# EAGLE board brandon_moded_satshakitpcb (EAGLE 6.5.0)
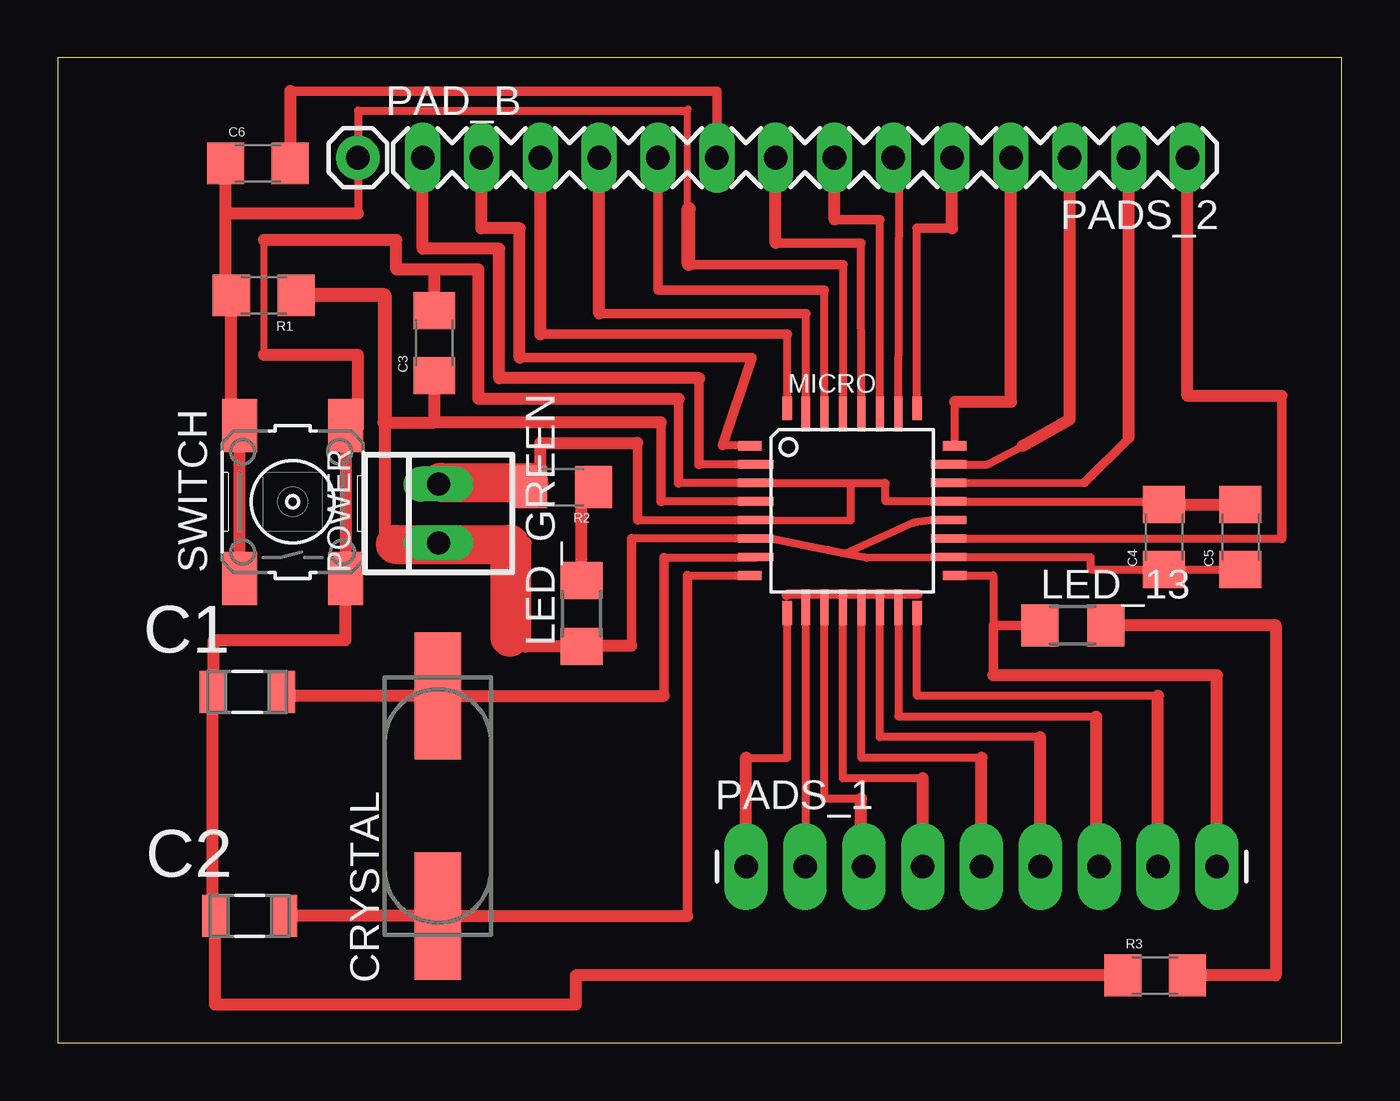
[diagram p0: board, top side]

Size 55.42 x 42.54 mm. Coordinates in mm from the lower left corner, seen from the top.
Outline: 0,0 55.42,0 55.42,42.54 0,42.54 0,0
Copper layers (1*16): Top 0.035mm / dielectric 1.5mm / Bottom 0.035mm
Design rules "default": minimum track width 10mil, minimum drill 24mil, track to track 8mil, track to pad 8mil, pad to pad 8mil, via to via 8mil, smd to smd 8mil, copper to edge 40mil, drill to drill 8mil, minimum pad ring 10mil, minimum via ring 8mil, stop-mask expansion 4mil, vias tented up to drill 0mil, thermal gap 10mil

## Footprints (pad centres in the part's own frame; a part is rotated, then mirrored left to right if it is on the bottom)
CAPC3216X178N = smd 1.118 x 1.803: 1 -1.499,0; 2 1.499,0
1206 = smd 1.6 x 1.8: 1 -1.4,0; 2 1.4,0
CSM-7X-DU = smd 5.5 x 2: 1 -4.75,0; 2 4.75,0
1206' = smd 1.6 x 1.803: 1 -1.422,0; 2 1.422,0
TQFP32-08 = smd 1.016 x 0.406: 1 -4.42,2.8; 8 -4.42,-2.8; 17 4.42,-2.8; 24 4.42,2.8 | smd 1.524 x 0.356: 2 -4.166,2; 3 -4.166,1.2; 4 -4.166,0.4; 5 -4.166,-0.4; 6 -4.166,-1.2; 7 -4.166,-2; 18 4.166,-2; 19 4.166,-1.2; 20 4.166,-0.4; 21 4.166,0.4; 22 4.166,1.2; 23 4.166,2 | smd 0.406 x 1.016: 9 -2.8,-4.42; 16 2.8,-4.42; 25 2.8,4.42; 32 -2.8,4.42 | smd 0.356 x 1.524: 10 -2,-4.166; 11 -1.2,-4.166; 12 -0.4,-4.166; 13 0.4,-4.166; 14 1.2,-4.166; 15 2,-4.166; 26 2,4.166; 27 1.2,4.166; 28 0.4,4.166; 29 -0.4,4.166; 30 -1.2,4.166; 31 -2,4.166
1X01 = drill 1.016 pad 1.88: 1 0,0
1X09_LONGPADS = drill 1.016 pad 1.88 long: 1 0,0; 2 2.54,0; 3 5.08,0; 4 7.62,0; 5 10.16,0; 6 12.7,0; 7 15.24,0; 8 17.78,0; 9 20.32,0
1X14-LONGPADS = drill 1.016 long: 1 0,0; 2 2.54,0; 3 5.08,0; 4 7.62,0; 5 10.16,0; 6 12.7,0; 7 15.24,0; 8 17.78,0; 9 20.32,0; 10 22.86,0; 11 25.4,0; 12 27.94,0; 13 30.48,0; 14 33.02,0
22-23-2021 = drill 1 long: 1 -1.27,0; 2 1.27,0
6MM_SWITCH = smd 2.286 x 1.524: 1 -3.302,2.286; 2 3.302,2.286; 3 -3.302,-2.286; 4 3.302,-2.286

## Placement (x,y rotation side)
C1  22pF  [CAPC3216X178N]  8.18,15.16 0 top
C2  22pF  [CAPC3216X178N]  8.28,5.49 0 top
C3  10uF  [1206]  16.26,30.23 90 top
C4  1uF  [1206]  47.75,21.84 90 top
C5  100nF  [1206]  51.05,21.84 90 top
C6  100nF  [1206]  8.64,37.97 0 top
CRYSTAL  16Mhz  [CSM-7X-DU]  16.41,10.24 90 top
LED_13  YELLOW  [1206']  43.81,18.03 0 top
LED_GREEN  [1206']  22.61,18.54 90 top
MICRO  ATMEGA328P-AU  [TQFP32-08]  34.29,22.99 0 top
PAD_B  M01PTH  [1X01]  12.95,38.23 0 top
PADS_1  M09LONGPADS  [1X09_LONGPADS]  29.72,7.62 0 top
PADS_2  M14LONGPADS  [1X14-LONGPADS]  48.77,38.23 180 top
POWER  22-23-2021  [22-23-2021]  16.43,22.86 90 top
R1  10k  [1206]  8.89,32.28 180 top
R2  499  [1206]  21.72,24 180 top
R3  499  [1206]  47.37,2.92 0 top
SWITCH  [6MM_SWITCH]  10.13,23.37 90 top

## Library data of the parts
C1 C2 = AVX_By_element14_Batch_1; MPN: 0612ZC225MAT2A; OC_FARNELL: -; OC_NEWARK: 12N3209; SUPPLIER: AVX; TOLERANCE: ±20%; VOLTAGERATING: 10V
C3-C6 PAD_B PADS_1 PADS_2 R1-R3 = 01_SparkFun
CRYSTAL = 01_FAB_Hello; OC_FARNELL: unknown; OC_NEWARK: unknown
LED_13 LED_GREEN SWITCH = 01_FAB_Hello
MICRO = atmega8
POWER = con-molex; MF: MOLEX; MPN: 22-23-2021; OC_FARNELL: 1462926; OC_NEWARK: 25C3832

## Nets
GND: C1.1 C2.1 R3.1 SWITCH.3 SWITCH.4
N$1: MICRO.9 PADS_1.1
N$2: C1.2 CRYSTAL.2 MICRO.7
N$3: C6.2 PADS_2.9
N$4: MICRO.10 PADS_1.2
N$5: MICRO.11 PADS_1.3
N$6: MICRO.12 PADS_1.4
N$7: MICRO.13 PADS_1.5
N$8: MICRO.14 PADS_1.6
N$9: C2.2 CRYSTAL.1 MICRO.8
N$10: PADS_1.7
N$11: MICRO.16 PADS_1.8
N$12: LED_13.1 MICRO.17 PADS_1.9
N$13: MICRO.19 PADS_2.1
N$14: PADS_2.2
N$15: MICRO.23 PADS_2.3
N$16: MICRO.24 PADS_2.4
N$17: MICRO.25 PADS_2.5
N$18: MICRO.26 PADS_2.6
N$19: MICRO.27 PADS_2.7
N$20: MICRO.30 PADS_2.10
N$21: MICRO.31 PADS_2.11
N$22: MICRO.32 PADS_2.12
N$23: MICRO.1 PADS_2.13
N$24: MICRO.2 PADS_2.14
N$25: MICRO.28 PADS_2.8
N$26: LED_GREEN.2 R2.1
N$27: LED_13.2 R3.2
N$28: C6.1 PAD_B.1 R1.2 SWITCH.1 SWITCH.2
S$3: POWER.2 R2.2
S$4: MICRO.5
S$8: C4.2 C5.2 MICRO.21
S$14: MICRO.29
S$18: C3.2
VCC: C3.1 LED_GREEN.1 MICRO.4 MICRO.6 MICRO.18 MICRO.20 POWER.1 R1.1

## Tracks (layer width: path | path; a pad name or v marks a point on that pad's centre or on a via)
GND
  Top 0.305: C2.1 6.68,5.49 | 6.6,15.16 C1.1 6.73,15.16 | SWITCH.4 12.95,26.54
  Top 0.508: SWITCH.4 SWITCH.3 12.42,17.4 6.73,17.4 6.73,15.16 | 6.68,5.49 C1.1 | C2.1 6.78,1.65 22.35,1.65 22.35,2.92 R3.1 | 12.95,26.54 12.95,29.72 8.89,29.72
N$1
  Top 0.356: 29.72,12.32 31.49,12.32 MICRO.9
  Top 0.508: PADS_1.1 29.72,12.32
N$2
  Top 0.305: 30.12,20.95 MICRO.7 | 9.68,14.99 C1.2 9.68,14.99
  Top 0.356: 26.16,20.95 30.12,20.95
  Top 0.406: 26.16,14.99 26.16,20.95
  Top 0.508: 26.16,14.99 CRYSTAL.2 9.68,14.99
N$3
  Top 0.406: 10.04,41.1 28.45,41.1 PADS_2.9
  Top 0.508: 10.04,41.1 C6.2
N$4
  Top 0.305: PADS_1.2 32.29,7.62
  Top 0.356: 32.29,7.62 MICRO.10
N$5
  Top 0.305: PADS_1.3 34.67,7.62
  Top 0.356: 34.67,10.54 33.09,10.54 MICRO.11
  Top 0.508: 34.67,7.62 34.67,10.54
N$6
  Top 0.305: MICRO.12 33.91,18.82
  Top 0.356: 37.34,11.43 33.89,11.43 MICRO.12
  Top 0.508: PADS_1.4 37.34,11.43
N$7
  Top 0.356: 39.88,12.32 34.69,12.32 MICRO.13
  Top 0.508: PADS_1.5 39.88,12.32
N$8
  Top 0.356: 42.42,13.21 35.49,13.21 MICRO.14
  Top 0.508: PADS_1.6 42.42,13.21
N$9
  Top 0.305: 9.78,5.46 C2.2 | MICRO.8 | C2.2
  Top 0.356: 27.18,20.19 MICRO.8
  Top 0.406: 27.18,5.49 27.18,20.19
  Top 0.508: C2.2 CRYSTAL.1 27.18,5.49
N$10
  Top 0.305: PADS_1.7 44.83,7.62
  Top 0.508: 44.83,7.62 44.83,14.1
N$11
  Top 0.305: MICRO.16
  Top 0.356: 47.5,14.99 37.09,14.99 MICRO.16
  Top 0.508: PADS_1.8 47.5,14.99
N$12
  Top 0.356: MICRO.17 40.39,20.19 40.39,18.03
  Top 0.406: 40.39,15.88 40.39,18.03 LED_13.1
  Top 0.508: PADS_1.9 50.04,15.88 40.39,15.88
N$13
  Top 0.356: MICRO.19 52.83,21.79
  Top 0.406: 52.83,21.79 52.83,27.94
  Top 0.508: 52.83,27.94 48.77,27.94 PADS_2.1
N$14
  Top 0.508: 46.23,26.16 PADS_2.2
N$15
  Top 0.356: MICRO.23 40.13,24.99 41.66,25.78
  Top 0.508: 41.66,25.78 43.69,26.92 PADS_2.3
N$16
  Top 0.356: 38.73,25.79 38.73,27.69
  Top 0.406: MICRO.24 38.73,25.79
  Top 0.508: PADS_2.4 41.15,27.69 38.73,27.69
N$17
  Top 0.356: MICRO.25 37.08,35.18
  Top 0.406: 37.08,35.18 38.61,35.18
  Top 0.508: 38.61,35.18 PADS_2.5
N$18
  Top 0.356: MICRO.26 36.3,27.1 36.32,37.34
  Top 0.508: 36.32,37.34 arc-90 36.07,37.59 PADS_2.6
N$19
  Top 0.356: MICRO.27 35.49,35.56
  Top 0.406: 35.49,35.56 33.53,35.56
  Top 0.508: 33.53,35.56 PADS_2.7
N$20
  Top 0.356: MICRO.30 33.09,32.51
  Top 0.406: 33.09,32.51 25.91,32.51 PADS_2.10
N$21
  Top 0.356: MICRO.31 32.29,31.5
  Top 0.406: 32.29,31.5 23.37,31.5
  Top 0.508: 23.37,31.5 PADS_2.11
N$22
  Top 0.356: MICRO.32 31.5,30.61
  Top 0.406: 31.5,30.61 20.83,30.61 | MICRO.32
  Top 0.508: 20.83,30.61 PADS_2.12
N$23
  Top 0.356: MICRO.1 28.7,25.79
  Top 0.406: 28.7,25.79 29.97,29.59 19.94,29.59
  Top 0.508: 19.94,29.59 19.94,35.18 18.29,35.18 PADS_2.13
N$24
  Top 0.356: MICRO.2 27.69,24.99
  Top 0.406: 27.69,24.99 27.69,28.7
  Top 0.508: 27.69,28.7 19.05,28.7 19.05,34.29 15.75,34.29 PADS_2.14
N$25
  Top 0.305: MICRO.28 34.7,27.13
  Top 0.356: 34.7,27.13 34.67,34.54
  Top 0.406: 34.67,34.54 30.99,34.54
  Top 0.508: 30.99,34.54 PADS_2.8
N$26
  Top 0.305: 22.61,23.62 23.12,23.62 R2.1
  Top 0.508: R2.1 23.5,23.75 | LED_GREEN.2 22.61,23.62
N$27
  Top 0.508: R3.2 52.58,2.92 52.58,18.03 LED_13.2
N$28
  Top 0.305: 8.25,26.67 SWITCH.2 7.49,26.67 | R1.2 7.24,32.28
  Top 0.356: 27.18,40.26 12.95,40.26 PAD_B.1 12.95,35.81
  Top 0.406: SWITCH.1 7.75,20.07
  Top 0.508: SWITCH.1 SWITCH.2 | 7.49,26.67 R1.2 | 7.24,32.28 7.24,35.81 | 7.24,35.81 C6.1 | 12.95,35.81 7.24,35.81
S$1
  Top 0.356: 38.98,24.18 44.32,24.19
  Top 0.406: 44.32,24.19 46.23,26.1
S$2
  Top 0.356: 36.28,18.81 36.28,14.11 44.87,14.11
S$3
  Top 0.305: 20.83,23.88 20.82,23.88 R2.2 20.82,24.13
  Top 0.406: 25.02,25.91 25.02,22.61
  Top 0.508: 25.02,25.91 20.83,25.91 20.83,23.88 | POWER.2 20.82,24.13
S$4
  Top 0.305: MICRO.5
S$5
  Top 0.356: 30.19,22.58 34.23,22.57
S$6
  Top 0.356: 34.24,22.58 34.24,24.17
S$7
  Top 0.356: 25.03,22.55 arc-90 25.06,22.58 30.21,22.58
S$8
  Top 0.305: 47.75,23.39 C4.2
  Top 0.356: MICRO.21 47.75,23.39
  Top 0.508: C4.2 C5.2
S$9
  Top 0.356: 30.12,24.18 35.72,24.18
S$10
  Top 0.356: 30.11,24.18 26.76,24.18
S$11
  Top 0.356: 38.43,23.38 35.74,23.38 35.74,24.14 arc90 35.69,24.19
S$13
  Top 0.356: 38.58,20.98 44.58,20.98 44.58,20.45 51.09,20.45
S$14
  Top 0.356: 33.89,33.6 MICRO.29
  Top 0.406: 27.18,33.6 33.89,33.6
S$15
  Top 0.305: 27.2,40.34 27.22,40.34
S$16
  Top 0.61: 27.24,33.64 27.23,33.64 27.23,36.02
S$17
  Top 0.305: 27.2,36.16 27.18,36.16 27.18,40.28
S$18
  Top 0.305: 8.89,34.67 8.88,34.67 8.88,29.67
  Top 0.406: 26.8,24.19 26.8,27.81
  Top 0.508: 26.8,27.81 18.16,27.81 18.16,33.4 16.26,33.4 | C3.2 16.26,33.4 | 16.26,33.4 14.61,33.4 14.61,34.67 8.89,34.67
S$19
  Top 0.406: 31.46,19.32 31.53,19.39 37.12,19.39
S$20
  Top 1.676: 16.54,24.21 20.33,24.21 20.33,24.16
S$21
  Top 1.676: 14.58,21.53 19.51,21.53 19.51,17.51
VCC
  Top 0.254: 37.85,22.59 37.82,22.58
  Top 0.305: MICRO.18 38.51,20.98 | 22.61,17.14 LED_GREEN.1
  Top 0.356: MICRO.20 | MICRO.4 26.04,23.39 | 24.77,21.79 MICRO.6 30.81,21.79 33.27,21.29 34.02,21.14 | MICRO.20 37.82,22.58 36.96,22.47 34.02,21.14 | 34.02,21.14 34.92,20.95 38.51,20.98 | MICRO.20 37.85,22.59
  Top 0.406: 26.04,23.39 26.04,26.8 | 24.77,21.79 24.77,17.14
  Top 0.508: 26.04,26.8 16.26,26.8 | LED_GREEN.1 20.19,17.12 20.19,21.59 POWER.1 14.1,21.59 14.1,26.8 16.26,26.8 | 24.77,17.14 22.61,17.14 | 16.26,26.8 C3.1
  Top 0.61: 14.1,26.8 14.1,32.28 R1.1